# Altium PCB board.PcbDoc (part 2 of 2)
Units mm, origin at the board's own origin, x right, y up, seen from the top; angles counter-clockwise.
Board outline 123 x 60 mm, 4 copper layers (Top Layer, Mid Layer 1, Mid Layer 2, Bottom Layer), stack 1.17 mm thick; 104 components, 66 nets, 349 pads, 110 vias.
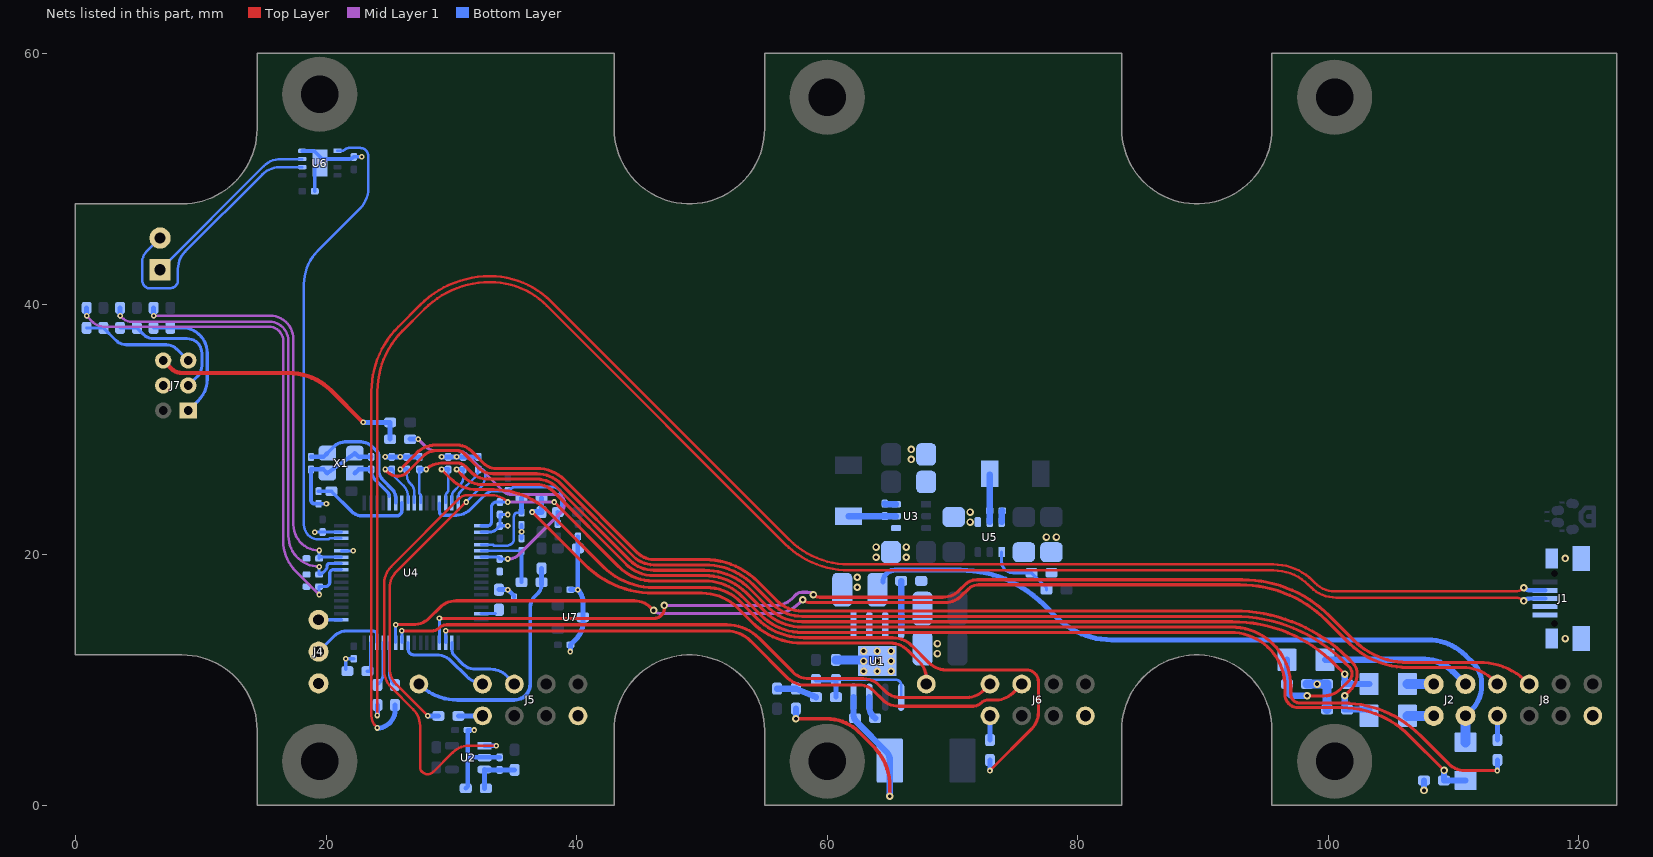
[diagram p4: the nets of this part, all layers, seen from the top]

## Via types
v1: diameter 0.45, hole 0.2, Top Layer to Bottom Layer, tented both sides, 59 vias
v2: diameter 0.6, hole 0.3, Top Layer to Bottom Layer, tented both sides, 51 vias

## Nets (pads, with @x,y where several pads share a name; then routed paths per layer and width w, separated by ;. In a path a pad name is that pad's centre, name@x,y a point inside that pad or via, vN(x,y) a via of type N, cw(c..) or ccw(c..) an arc to the next point about the centre after c; other vN are vias at no path point) (continued)
CAN_TX: U4.62 U6.1 | length 37.9
  Bottom Layer w0.2: U6.1@20.9,52.225 21.239,52.225 ccw(c21.239,52.624) 21.522,52.342 cw(c21.804,52.06) 21.804,52.459 22.725,52.459 cw(c22.725,51.818) 23.366,51.818 23.366,49.223 cw(c21.099,49.223) 22.702,47.62 19.342,44.26 ccw(c22.01,41.592) 18.237,41.592 18.237,22.381 ccw(c19.406,22.381) 19.406,21.213 20.13,21.213 ccw(c20.13,21.363) 20.236,21.257 cw(c20.342,21.15) 20.342,21.3 U4.62@21.225,21.3
DM: R3.1 U4.44 | length 3.4
  Bottom Layer w0.25: U4.44@25.05,12.975 25.05,10.555 ccw(c26.27,10.555) R3.1@25.407,9.693
DP: R5.1 U4.45 | length 3.4
  Bottom Layer w0.25: R5.1@24.193,9.693 ccw(c23.331,10.555) 24.55,10.555 U4.45@24.55,12.975
GND: C1.1 C5.1 C6.1 C7.1 C8.1 C10.2 C11.2 C12.2 C13.2 C14.1 C15.1 C16.1 C18.1 C19.1 C20.1 C21.2 C22.2 C23.2 C24.1 C25.1 C26.1 C27.1 C28.1 C29.1 C30.1 C31.1 C32.1 C33.1 C34.1 C35.2 C36.2 C37.2 C38.1 C39.1 C40.1 C41.1 C42.1 C45.1 J1.4 J1.5 J1.6 J1.7 J1.8 J1.9 J4.3 J5.7 J6.7 J7.4 J8.7 L5.1 R6.2 R7.2 R8.2 R15.2 R26.2 R33.2 R34.2 R35.2 U1.1 U1.9 U2.2 U3.4 U4.18 U4.60 U4.63 U5.4 U6.2 U6.8 U6.9 U7.3 X1.2 X1.4 | length 59.4
  Bottom Layer w0.25: v1(19.091,21.8) C24.1@19.726,21.8 U4.63@21.225,21.8 ; U4.60@21.225,20.3 v1(22.16,20.3) ; C42.1@21.575,10.825 v1(21.575,11.688) C27.1@22.21,11.688 ; U4.18@32.376,21.8 33.101,21.8 ccw(c33.101,22.463) 33.569,21.995 C25.1@33.875,22.3 ; v1(34.51,22.3) C25.1@33.875,22.3 ; v1(34.51,23.2) C10.2@33.875,23.2 C25.1@33.875,22.3
  Bottom Layer w0.3: U6.8@18.1,52.225 19.05,52.225 19.7,51.575 U6.2@20.9,51.575 21.798,51.575 ccw(c21.798,52.172) C31.1@22.221,51.75 v1(22.856,51.75) ; C34.1@18.8,26.8 18.8,24.361 ccw(c19.1,24.361) 19.1,24.061 v1(20.035,24.061) ; C32.1@19.1,49 19.1,50.85 U6.9@19.5,51.25
  Bottom Layer w0.35: C34.1@18.8,26.8 19.8,26.8 X1.4@20.1,26.5 X1.2@22.3,28.1 22.6,27.8 C33.1@23.6,27.8 ; R7.2@31.15,1.35 31.3,1.5 31.3,3.825 ; v1(31.835,6) C6.1@31.3,6 31.3,3.825 ; C5.1@33.85,3.825 31.3,3.825 ; v1(34.51,17.2) 34.922,16.788 cw(c34.734,16.6) C26.1@35,16.6 ; C29.1@35.6,21.3 v1(35.6,21.835) C30.1@35.6,22.36 ; v1(40.1,17.2) C45.1@40.1,20.5 L5.1@40.1,21.45
  Bottom Layer w0.4: v1(24.715,27.8) C35.2@25.25,27.8 v1(25.915,27.8) C36.2@26.45,27.8 C37.2@27.45,27.8 ; v1(29.216,27.8) C13.2@29.751,27.8 v1(30.416,27.8) C12.2@30.951,27.8 C11.2@32.151,27.8 ; C41.1@33.8,17.2 v1(34.51,17.2) ; v1(39.5,12.265) C39.1@39.5,12.8 39.957,13.257 ccw(c38.646,14.568) 40.5,14.568 U7.3@40.5,15 40.5,16.235 ccw(c39.135,16.235) v1(40.1,17.2) C40.1@39.5,17.2
  Bottom Layer w0.5: v2(107.634,1.176) R15.2@107.634,1.976
  Bottom Layer w0.7: R8.2@60.7,11.6 63.9,11.6 cw(c63.9,11.5) v2(64,11.5) ; R33.2@98.3,9.67 v2(99.1,9.67) R35.2@99.9,9.67 R34.2@99.9,7.63
  other v2: 62.9,10.7 64,10.7 65.1,10.7 62.9,11.5 65.1,11.5 68.8,12.1 62.9,12.3 64,12.3 65.1,12.3 68.8,12.9 118.9,13.3 62.4,17.4 62.4,18.2 118.9,19.7 63.9,19.8 66.3,19.8 63.9,20.6 66.3,20.6 77.5,21.4 78.3,21.4 71.4,22.6 71.4,23.4 66.7,27.6 66.7,28.4
HALL_1: J7.1 R9.1 R19.2 | length 10.6
  Bottom Layer w0.25: R19.2@6.233,38.1 R9.1@7.569,38.1 8.521,38.1 cw(c8.521,36.105) 10.516,36.105 10.516,33.981 cw(c8.185,33.981) 9.833,32.333 J7.1@9,31.5
HALL_2: J7.3 R10.1 R20.2 | length 10.5
  Bottom Layer w0.25: R20.2@3.561,38.1 R10.1@4.897,38.1 5.418,37.579 ccw(c6.245,38.405) 6.245,37.236 8.915,37.236 cw(c8.915,36.068) 10.084,36.068 10.084,35.068 cw(c8.915,35.068) 9.742,34.242 J7.3@9,33.5
HALL_3: J7.5 R11.1 R21.2 | length 9.1
  Bottom Layer w0.25: R21.2@0.889,38.1 R11.1@2.225,38.1 3.229,37.096 ccw(c4.055,37.922) 4.055,36.754 7.262,36.754 cw(c7.262,35.585) 8.088,36.412 J7.5@9,35.5
NetC2_1: C2.1 U1.7 | length 1.8
  Bottom Layer w0.5: U1.7@63.365,8.625 63.365,7.814 ccw(c64.356,7.814) 63.655,7.113 C2.1@63.825,6.944
NetC2_2: C2.2 L1.1 R1.1 U1.8 | length 21.1
  Top Layer w0.3: v2(57.5,6.9) 59.947,6.9 cw(c59.947,3.208) 62.558,5.818 63.672,4.705 cw(c60.465,1.498) 65,1.499 v2(65,0.724)
  Bottom Layer w0.5: v2(57.5,6.9) R1.1@57.5,7.7 ; U1.8@62.095,8.625 62.095,7.302 ccw(c63.086,7.302) 62.385,6.601 64.71,4.277 cw(c64.009,3.576) L1.1@65,3.576 ; v2(65,0.724) L1.1@65,3.56
NetC3_1: C3.1 C4.2 R1.2 | length 3.2
  Bottom Layer w0.5: C3.1@56,9.3 R1.2@57.5,9.3 C4.2@59.1,8.625
NetC4_1: C4.1 R2.2 R8.1 U1.5 | length 9.4
  Bottom Layer w0.2: R8.1@60.7,10 65.5,10 cw(c65.5,9.595) 65.905,9.595 U1.5@65.905,8.625
  Bottom Layer w0.4: R2.2@59.1,10 R8.1@60.7,10 C4.1@60.7,8.625
NetC5_2: C5.2 R4.2 R7.1 U2.3 | length 3.9
  Bottom Layer w0.4: R7.1@32.65,1.35 U2.3@32.65,2.825 ; U2.3@32.65,2.85 U2.3@32.65,2.825 ; R4.2@35.05,2.825 C5.2@33.85,2.825 U2.3@32.65,2.825
NetC9_1: C9.1 U3.6 | length 0.9
  Bottom Layer w0.5: C9.1@64.6,24.072 ccw(c64.65,24.072) 64.65,24.022 U3.6@65.5,24.022
NetC9_2: C9.2 L2.1 U3.5 | length 3.8
  Bottom Layer w0.5: L2.1@61.7,23.072 C9.2@64.6,23.072 U3.5@65.5,23.072
NetC11_1: C11.1 R18.2 U4.16 | length 28.4
  Top Layer w0.2: v1(28.125,7.13) 25.621,9.634 cw(c26.932,10.945) 25.078,10.945 25.078,17.331 cw(c26.932,17.331) 25.621,18.642 v1(31.179,24.2)
  Bottom Layer w0.2: U4.16@30.55,24.126 30.55,24.623 cw(c31.077,24.623) 30.705,24.996 31.882,26.174 ; v1(31.179,24.2) 32.343,25.364 ccw(c31.481,26.226) 32.7,26.226 32.7,26.5 ccw(c32.4,26.5) 32.4,26.8 C11.1@32.151,26.8 cw(c31.288,26.8) 31.898,26.189
  Bottom Layer w0.4: v1(28.125,7.13) R18.2@28.96,7.13
NetC12_1: C12.1 R17.2 U4.15 | length 97.5
  Top Layer w0.25: v1(30.416,26.8) 31.073,26.143 ccw(c32.384,27.454) 32.335,25.601 ccw(c32.384,27.454) 32.384,25.6 36.817,25.6 cw(c36.817,23.746) 38.128,25.057 43.939,19.247 ccw(c46.157,21.465) 46.157,18.328 50.216,18.328 cw(c50.216,13.641) 53.53,16.955 55.056,15.429 ccw(c57.976,18.35) 57.976,14.22 92.26,14.22 cw(c92.26,9.48) 97,9.48 97,8.881 ccw(c97.735,8.881) 97.735,8.146 101.181,8.146 cw(c101.181,-0.48) 107.28,5.62 109.6,3.3 ccw(c110.892,4.592) 110.892,2.765 v1(113.49,2.765)
  Bottom Layer w0.2: U4.15@30.05,24.126 30.05,24.687 cw(c30.604,24.687) 30.212,25.079 30.712,25.579 ccw(c30.137,26.154) 30.951,26.154 C12.1@30.951,26.8
  Bottom Layer w0.35: v1(30.416,26.8) C12.1@30.951,26.8
  Bottom Layer w0.4: v1(113.49,2.765) R17.2@113.49,3.6
NetC13_1: C13.1 R16.2 U4.14 | length 66.3
  Top Layer w0.25: v1(29.216,26.8) 29.974,26.042 ccw(c32.043,28.111) 32.043,25.185 33.416,25.185 cw(c33.416,18.986) 37.799,23.369 42.132,19.037 ccw(c46.147,23.052) 46.147,17.373 50.357,17.373 cw(c50.357,13.556) 53.056,16.255 54.416,14.895 ccw(c58.112,18.592) 58.113,13.364 65.258,13.364 cw(c65.258,11.245) 66.757,12.743 68.157,11.343 ccw(c69.468,12.654) 69.468,10.8 75.9,10.8 cw(c75.9,9.84) 76.86,9.84 76.86,7.403 cw(c75.006,7.403) 76.317,6.092 v1(72.99,2.765)
  Bottom Layer w0.2: U4.14@29.55,24.126 29.55,24.687 cw(c29.892,24.687) 29.65,24.929 ; 29.651,24.929 ccw(c29.409,25.171) 29.751,25.171 C13.1@29.751,26.8
  Bottom Layer w0.35: v1(29.216,26.8) C13.1@29.751,26.8
  Bottom Layer w0.4: v1(72.99,2.765) R16.2@72.99,3.6
NetC17_1: C17.1 U5.6 | length 0.9
  Bottom Layer w0.5: U5.6@73.922,22.6 73.922,23.45 cw(c73.972,23.45) C17.1@73.972,23.5
NetC17_2: C17.2 L3.1 U5.5 | length 3.8
  Bottom Layer w0.5: U5.5@72.972,22.6 C17.2@72.972,23.5 L3.1@72.972,26.4
NetC21_1: C21.1 R19.1 U4.59 | length 33.4
  Mid Layer 1 w0.2: v1(6.233,39.065) 15.515,39.065 cw(c15.515,37.181) 17.399,37.181 17.399,22.383 ccw(c19.448,22.383) v1(19.448,20.334)
  Bottom Layer w0.25: v1(19.448,20.334) C21.1@19.448,19.699 cw(c19.55,19.699) 19.55,19.8 U4.59@21.225,19.8
  Bottom Layer w0.4: v1(6.233,39.065) R19.1@6.233,39.7
NetC22_1: C22.1 R20.1 U4.58 | length 37.4
  Mid Layer 1 w0.2: v1(3.561,39.065) 3.694,38.932 ccw(c4.52,39.758) 4.52,38.59 15.472,38.59 cw(c15.472,37.07) 16.993,37.07 16.993,21.502 ccw(c19.448,21.502) v1(19.448,19.046)
  Bottom Layer w0.25: v1(19.448,19.046) C22.1@19.448,18.411 ccw(c19.448,18.79) 19.716,18.522 19.93,18.736 ccw(c19.54,19.126) 20.091,19.126 cw(c20.266,19.126) 20.266,19.3 U4.58@21.225,19.3
  Bottom Layer w0.4: v1(3.561,39.065) R20.1@3.561,39.7
NetC23_1: C23.1 R21.1 U4.57 | length 42.1
  Mid Layer 1 w0.2: v1(0.889,39.065) 1.41,38.544 ccw(c2.236,39.37) 2.236,38.202 15.418,38.202 cw(c15.418,37.033) 16.586,37.033 16.586,21.078 ccw(c19.969,21.078) 17.577,18.686 v1(19.448,16.815)
  Bottom Layer w0.25: v1(19.448,16.815) C23.1@19.448,17.45 19.947,17.45 ccw(c19.947,17.797) 20.295,17.797 20.295,18.517 cw(c20.578,18.517) 20.578,18.8 U4.57@21.225,18.8
  Bottom Layer w0.4: v1(0.889,39.065) R21.1@0.889,39.7
NetC28_2: C28.2 R25.1 U4.22 | length 23.2
  Mid Layer 1 w0.25: v1(27.35,29.21) 27.918,28.642 ccw(c28.744,29.468) 28.744,28.3 30.423,28.3 cw(c30.423,27.132) 31.25,27.958 34.126,25.082 ccw(c34.779,25.735) 34.779,24.811 38.334,24.811 cw(c38.334,24.109) 39.036,24.089 cw(c37.967,24.089) 38.723,23.333 35.384,19.994 cw(c34.557,20.82) 34.557,19.652 v1(34.501,19.652)
  Bottom Layer w0.25: U4.22@32.376,19.8 33.717,19.8 cw(c33.717,19.652) C28.2@33.866,19.652 v1(34.501,19.652)
  Bottom Layer w0.4: R25.1@26.715,29.21 v1(27.35,29.21)
NetC29_2: C29.2 R24.1 U4.21 | length 5.7
  Bottom Layer w0.2: U4.21@32.376,20.3 C29.2@35.6,20.3
  Bottom Layer w0.3: R24.1@35.6,17.8 C29.2@35.6,20.3
NetC30_2: C30.2 R23.1 U4.20 | length 6.7
  Bottom Layer w0.2: U4.20@32.376,20.8 33.258,20.8 cw(c33.258,20.65) 33.364,20.757 ccw(c33.47,20.863) 33.47,20.713 34.413,20.713 ccw(c34.413,21.3) 35.001,21.3 35.001,23.056 cw(c35.305,23.056) 35.305,23.36 C30.2@35.6,23.36
  Bottom Layer w0.4: C30.2@35.6,23.36 R23.1@35.6,24.5
NetC33_2: C33.2 U4.5 X1.1 | length 4.1
  Bottom Layer w0.28: C33.2@23.6,26.792 ccw(c24.819,26.792) 23.957,25.929 24.918,24.968 cw(c24.6,24.65) U4.5@25.05,24.65
  Bottom Layer w0.35: X1.1@22.3,26.5 22.6,26.8 C33.2@23.6,26.8
NetC34_2: C34.2 U4.6 X1.3 | length 10.6
  Bottom Layer w0.28: X1.3@20.1,28.1 20.643,28.643 cw(c21.505,27.781) 21.505,29 22.795,29 cw(c22.795,27.781) 23.657,28.643 24.059,28.241 ; 24.059,28.241 cw(c23.717,27.9) 24.2,27.9 24.2,26.798 ccw(c25.419,26.798) 24.557,25.936 25.296,25.196 cw(c24.6,24.55) 25.55,24.55 U4.6@25.55,24.126
  Bottom Layer w0.35: C34.2@18.8,27.8 19.8,27.8 X1.3@20.1,28.1
NetC35_1: C35.1 R29.1 R33.1 U4.8 | length 96.7
  Top Layer w0.25: v1(24.715,26.8) 24.935,26.58 ccw(c25.724,27.369) 25.724,26.253 ccw(c25.724,27.29) 26.456,26.556 27.775,27.875 cw(c28.801,26.849) 28.801,28.3 30.503,28.3 cw(c30.503,27.631) 30.976,28.104 32.13,26.95 ccw(c33.323,28.143) 33.323,26.456 36.817,26.456 cw(c36.817,23.746) 38.733,25.662 44.543,19.852 ccw(c46.157,21.465) 46.157,19.183 50.216,19.183 cw(c50.216,13.641) 54.135,17.56 55.661,16.034 ccw(c57.976,18.35) 57.976,15.075 92.452,15.075 cw(c92.452,2.588) 101.282,11.418 101.688,11.012 cw(c101.176,10.5) 101.9,10.5 cw(c101.176,10.5) 101.688,9.988 ; v2(98.3,8.73) 99.662,8.73 ccw(c99.662,10.584) 100.973,9.273 101.688,9.988
  Bottom Layer w0.2: C35.1@25.25,26.8 25.392,26.658 25.392,26.479 ccw(c25.824,26.479) 25.518,26.174 26.193,25.499 cw(c25.331,24.637) 26.55,24.637 U4.8@26.55,24.126
  Bottom Layer w0.35: v1(24.715,26.8) C35.1@25.25,26.8
  Bottom Layer w0.5: R29.1@96.7,11.6 R33.1@96.7,9.67 96.696,9.243 ccw(c97.209,9.243) 97.209,8.73 v2(98.3,8.73)
NetC36_1: C36.1 R30.1 R34.1 U4.9 | length 92.1
  Top Layer w0.25: v1(25.915,26.8) 27.229,28.114 cw(c28.742,26.601) 28.742,28.74 30.474,28.74 cw(c30.474,27.171) 31.584,28.281 32.566,27.298 ccw(c33.613,28.344) 33.613,26.865 ; 33.5,26.883 36.817,26.883 cw(c36.817,23.746) 39.036,25.964 44.846,20.154 ccw(c46.157,21.465) 46.157,19.611 50.216,19.611 cw(c50.216,13.641) 54.437,17.863 55.963,16.337 ccw(c57.976,18.35) 57.976,15.503 92.509,15.503 cw(c92.509,2.736) 101.536,11.764 101.946,11.354 cw(c101.093,10.5) 102.3,10.5 102.3,10.498 cw(c100.446,10.498) 101.757,9.187 v2(101.3,8.73)
  Bottom Layer w0.2: C36.1@26.45,26.8 26.45,26.327 ccw(c27.364,26.327) 26.718,25.68 26.811,25.588 cw(c26.232,25.009) 27.05,25.009 U4.9@27.05,24.126
  Bottom Layer w0.35: v1(25.915,26.8) C36.1@26.45,26.8
  Bottom Layer w0.5: R34.1@101.3,7.63 v2(101.3,8.73) ; R34.1@101.5,7.63 R30.1@103.256,7.63
NetC37_1: C37.1 R31.1 R35.1 U4.10 | length 85
  Top Layer w0.25: v1(27.985,26.8) cw(c29.192,25.593) 29.192,27.3 30.508,27.3 cw(c30.508,26.442) 31.115,27.049 31.593,26.571 ccw(c32.904,27.882) 32.904,26.028 36.817,26.028 cw(c36.817,23.746) 38.431,25.359 44.241,19.549 ccw(c46.157,21.465) 46.157,18.756 50.216,18.756 cw(c50.216,13.641) 53.833,17.258 55.358,15.732 ccw(c57.976,18.35) 57.976,14.647 92.331,14.647 cw(c92.331,3.078) 100.511,11.259 v2(101.3,10.47)
  Bottom Layer w0.2: C37.1@27.45,26.8 27.45,24.948 ccw(c27.643,24.948) 27.451,24.928 ccw(c27.643,24.948) 27.507,24.811 cw(c27.401,24.706) 27.546,24.741 cw(c27.401,24.706) U4.10@27.55,24.706 ; U4.10@27.55,24.126 U4.10@27.55,24.687
  Bottom Layer w0.35: C37.1@27.45,26.8 v1(27.985,26.8)
  Bottom Layer w0.5: R35.1@101.3,9.67 v2(101.3,10.47) ; R35.1@101.5,9.67 R31.1@103.256,9.67
NetC38_2: C38.2 R32.2 U4.7 | length 8.3
  Bottom Layer w0.28: R32.2@20.425,25.061 22.029,23.457 ccw(c22.891,24.319) 22.891,23.1 25.631,23.1 ccw(c25.631,23.519) 26.05,23.519 U4.7@26.05,24.126
  Bottom Layer w0.3: C38.2@19.4,25.061 R32.2@20.425,25.061
NetC41_2: C41.2 U4.31 | length 1.1
  Bottom Layer w0.25: U4.31@32.376,15.3 C41.2@33.501,15.3
NetC42_2: C42.2 U4.47 | length 2.5
  Bottom Layer w0.28: C42.2@23.3,10.7 23.55,10.7 U4.47@23.55,12.975
NetC43_2: C43.2 C44.2 L4.2 U4.13 | length 14
  Bottom Layer w0.25: U4.13@29.05,24.126 29.05,23.4 ccw(c29.306,23.4) 29.306,23.144 30.407,23.144 ccw(c30.407,24.682) 31.494,23.594 32.658,24.758 ; 32.658,24.758 cw(c33.484,23.932) 33.484,25.1 C43.2@34.51,25.1 cw(c35.234,24.376) 35.234,25.4 38.1,25.4 cw(c38.1,24.7) 38.8,24.7 C44.2@38.8,23.4
  Bottom Layer w0.35: L4.2@38.5,22.45 C44.2@38.5,23.4
NetJ1_2: J1.2 R3.2 | length 137.9
  Top Layer w0.2: v1(24.1,6.165) 23.968,6.297 cw(c24.791,7.121) 23.626,7.121 23.626,33.022 cw(c30.927,33.022) 25.765,38.185 27.503,39.923 cw(c33.057,34.369) 33.057,42.224 33.099,42.224 cw(c33.099,35.366) 37.948,40.215 56.966,21.197 ccw(c61.74,25.971) 61.74,19.22 95.615,19.22 cw(c95.615,14.791) 98.747,17.923 98.936,17.734 ccw(c100.533,19.33) 100.533,17.072 114.927,17.072 ccw(c114.927,18.021) v2(115.598,17.35)
  Bottom Layer w0.35: v2@115.598,17.35 ccw(c116.08,17.833) 116.08,17.15 J1.2@117.298,17.15
  Bottom Layer w0.4: v1(24.1,6.165) ccw(c24.1,7.565) 25.501,7.565 R3.2@25.501,8
NetJ1_3: J1.3 R5.2 | length 134.2
  Top Layer w0.2: v1(24.1,7.165) 24.1,33.022 cw(c30.927,33.022) 26.1,37.85 27.838,39.588 cw(c33.057,34.369) 33.057,41.75 33.099,41.75 cw(c33.099,35.366) 37.613,39.88 56.631,20.863 ccw(c61.74,25.971) 61.74,18.747 95.615,18.747 cw(c95.615,14.791) 98.412,17.588 98.601,17.399 ccw(c100.611,19.409) 100.611,16.566 114.955,16.566 cw(c114.955,15.658) v2(115.598,16.3)
  Bottom Layer w0.35: v2@115.598,16.3 cw(c116.08,15.817) 116.08,16.5 J1.3@117.298,16.5
  Bottom Layer w0.4: v1(24.1,7.165) R5.2@24.1,8
NetJ3_1: J3.1 U6.7 | length 14.9
  Bottom Layer w0.2: J3.1@6.75,42.73 15.022,51.002 cw(c16.405,49.619) 16.405,51.575 U6.7@18.1,51.575
NetJ3_2: J3.2 U6.6 | length 22
  Bottom Layer w0.2: J3.2@6.75,45.27 5.667,44.187 ccw(c6.471,43.383) 5.334,43.383 5.334,41.885 ccw(c5.969,41.885) 5.969,41.25 7.518,41.25 ccw(c7.518,41.91) 8.179,41.91 8.179,42.802 cw(c10.135,42.802) 8.752,44.185 14.919,50.352 cw(c16.302,48.969) 16.302,50.925 U6.6@18.1,50.925
NetR6_1: R6.1 U1.4 | length 3.5
  Bottom Layer w0.5: U1.4@65.905,14.375 R6.1@65.905,17.9
NetR13_1: R13.1 R24.2 TP2.1 | length 19.5
  Bottom Layer w0.3: TP2.1@27.41,9.67 ccw(c30.476,12.736) 30.476,8.4 35.03,8.4 ccw(c35.03,9.67) 36.3,9.67 36.3,15.795 cw(c37.519,15.795) 36.657,16.657 36.9,16.9 ccw(c36.175,17.625) R24.2@37.2,17.625
  Bottom Layer w0.4: R24.2@37.2,17.625 R24.2@37.2,17.8 R13.1@37.2,18.9
NetR14_1: R14.1 R23.2 TP1.1 | length 38.8
  Top Layer w0.25: v1(36.465,23.4) 40.671,19.195 ccw(c46.144,24.668) 46.144,16.927 50.01,16.927 cw(c50.01,12.924) 52.841,15.755 54.001,14.595 ccw(c58.006,18.6) 58.006,12.936 65.021,12.936 cw(c65.021,10.902) 66.459,12.341 67.367,11.433 cw(c66.056,10.122) 67.91,10.122 TP1.1@67.91,9.67
  Bottom Layer w0.4: R14.1@37.2,23.4 R23.2@37.2,24.5
  Bottom Layer w0.5: v1(36.465,23.4) R14.1@37.2,23.4
NetR26_1: R26.1 R27.2 U5.1 | length 5.5
  Bottom Layer w0.25: U5.1@73.922,20.2 73.922,19.446 ccw(c74.818,19.446) 74.818,18.55 R26.1@76.3,18.55 77.5,17.35 R27.2@77.5,17.2
SWCLK: J4.1 U4.49 | length 1.8
  Bottom Layer w0.25: J4.1@19.4,14.8 U4.49@21.225,14.8
SWDIO: J4.2 U4.46 | length 6.1
  Bottom Layer w0.25: J4.2@19.4,12.26 20.642,13.502 cw(c21.602,12.542) 21.602,13.9 23.746,13.9 cw(c23.746,13.595) 24.05,13.595 U4.46@24.05,12.975
TEMP_MTR: J7.6 R12.1 R25.2 | length 21.3
  Top Layer w0.35: J7.6@7,35.5 7.665,34.835 ccw(c8.491,35.662) 8.491,34.493 17.018,34.493 cw(c17.018,29.662) 20.434,33.078 v1(22.956,30.556)
  Bottom Layer w0.4: v1(22.956,30.556) R12.1@25.115,30.556 R25.2@25.115,29.21
U: J2.2 R29.2 | length 11.9
  Bottom Layer w0.5: R29.2@99.748,11.6 107.722,11.6 cw(c107.722,8.465) 109.938,10.682 J2.2@110.95,9.67
U_H: J5.2 U4.41 | length 7.6
  Bottom Layer w0.25: U4.41@26.55,12.975 26.55,12.45 ccw(c27,12.45) 27,12 28.793,12 cw(c28.793,10.293) 30,11.5 31.22,10.28 ccw(c32.5,11.561) 32.408,9.752 ccw(c32.5,11.561) J5.2@32.5,9.75 ; J5.2@32.455,9.705 J5.2@32.49,9.67
U_Iout: J5.1 R18.1 | length 1.9
  Bottom Layer w0.4: R18.1@30.56,7.13 J5.1@32.49,7.13
U_L: J5.4 U4.34 | length 6.7
  Bottom Layer w0.25: U4.34@30.05,12.975 30.05,12.363 ccw(c30.61,12.363) 30.214,11.967 30.917,11.265 ccw(c31.902,12.25) 31.902,10.857 33.125,10.857 cw(c33.125,9.003) 34.436,10.314 J5.4@35,9.75 ; J5.4@34.975,9.725 J5.4@35.03,9.67
V: J2.3 R30.2 | length 2.1
  Bottom Layer w0.8: R30.2@106.304,7.13 J2.3@108.41,7.13
V_H: J6.2 U4.42 | length 50.4
  Top Layer w0.25: v1(26.05,13.91) 28.43,13.91 ccw(c28.43,14.787) 29.05,14.167 cw(c29.613,13.605) 29.613,14.4 52.006,14.4 cw(c52.006,10.841) 54.522,13.358 57.236,10.643 ccw(c58.548,11.954) 58.548,10.1 62.9,10.1 cw(c62.9,8.349) 64.138,9.587 64.625,9.1 ccw(c65.832,10.307) 65.832,8.6 71.152,8.6 ccw(c71.152,10.454) 72.463,9.143 J6.2@72.99,9.67
  Bottom Layer w0.25: U4.42@26.05,12.975 v1(26.05,13.91)
V_Iout: J6.1 R16.1 | length 1.9
  Bottom Layer w0.4: R16.1@72.99,5.2 J6.1@72.99,7.13
V_L: J6.4 U4.35 | length 49.6
  Top Layer w0.25: v1(29.55,13.91) 51.948,13.91 cw(c51.948,11.154) 53.897,13.103 56.86,10.14 ccw(c58.172,11.451) 58.172,9.597 62.533,9.597 cw(c62.533,7.901) 63.731,9.101 64.388,8.443 ccw(c65.699,9.754) 65.699,7.9 71.66,7.9 ccw(c71.66,8.754) 72.263,8.149 ; 72.263,8.15 cw(c72.867,7.546) 72.867,8.4 73.492,8.4 ccw(c73.492,10.254) 74.803,8.943 J6.4@75.53,9.67
  Bottom Layer w0.25: U4.35@29.55,12.975 v1(29.55,13.91)
Vb: C1.2 J2.4 R22.1 U1.2 U1.3 | length 56.8
  Bottom Layer w0.4: C1.2@64.457,17.823 cw(c65.394,17.823) 65.394,18.759 70.646,18.759 cw(c70.646,9.39) 77.272,16.015 78.247,15.04 ccw(c82.689,19.482) 82.689,13.2 107.959,13.2 cw(c107.959,8.997) 110.931,11.969 111.584,11.316 cw(c110.05,9.781) 112.22,9.781 112.22,9.506 cw(c109.55,9.506) 111.438,7.618 J2.4@110.95,7.13
  Bottom Layer w0.8: R22.1@110.95,5.024 J2.4@110.95,7.13
VB_SNS: C10.1 R15.1 R22.2 U2.1 U4.17 | length 127.3
  Top Layer w0.2: v1(33.585,4.75) 31.418,4.75 ccw(c31.418,2.896) 30.107,4.207 28.573,2.673 cw(c28.103,3.144) 28.103,2.479 cw(c28.103,3.082) 27.5,3.082 27.5,6.341 ccw(c25.646,6.341) 26.957,7.652 25.189,9.42 cw(c26.5,10.731) 24.646,10.731 24.646,17.719 cw(c26.5,17.719) 25.189,19.03 30.665,24.506 cw(c31.229,23.941) 31.229,24.739 33.208,24.739 cw(c33.208,22.898) v1(34.51,24.2)
  Top Layer w0.25: v1(38.2,24.2) 43.373,19.027 ccw(c46.094,21.748) 46.094,17.9 50.216,17.9 cw(c50.216,13.641) 53.228,16.653 54.753,15.127 ccw(c57.976,18.35) 57.976,13.792 92.187,13.792 cw(c92.187,9.438) 96.541,9.438 96.541,8.84 ccw(c97.596,8.84) 97.596,7.784 101.124,7.784 cw(c101.124,0.295) 106.419,5.591 v2(109.234,2.776)
  Mid Layer 1 w0.25: v1(34.51,24.2) v1(38.2,24.2)
  Bottom Layer w0.25: U4.17@32.376,22.3 32.895,22.3 ccw(c32.895,22.605) 33.2,22.605 33.2,23.784 cw(c33.616,23.784) 33.616,24.2 C10.1@33.875,24.2 v1(34.51,24.2)
  Bottom Layer w0.35: U2.1@32.65,4.75 v1(33.585,4.75)
  Bottom Layer w0.5: v2(109.234,2.776) R15.1@109.234,1.976 R22.2@110.95,1.976
W: J2.1 R31.2 | length 2.1
  Bottom Layer w0.8: R31.2@106.304,9.67 J2.1@108.41,9.67
W_H: J8.2 U4.43 | length 93.6
  Top Layer w0.25: v1(25.55,14.41) 26.942,14.41 ccw(c26.942,16.264) 28.253,14.953 29.071,15.771 cw(c30.382,14.46) 30.382,16.314 44.603,16.314 cw(c44.603,14.46) 45.914,15.771 v2(46.141,15.544) ; v2(58.041,16.4) ccw(c58.582,16.941) 58.582,16.176 69.416,16.176 ccw(c69.416,18.01) 70.713,16.713 71.25,17.25 ; 71.251,17.251 cw(c72.095,16.405) 72.095,17.6 92.945,17.6 cw(c92.945,7.81) 99.867,14.733 101.678,12.922 ccw(c106.318,17.562) 106.318,11 110.698,11 cw(c110.698,7.471) 113.194,9.966 J8.2@113.49,9.67
  Mid Layer 1 w0.25: v2(46.141,15.544) ccw(c46.73,16.134) 46.73,15.3 55.767,15.3 ccw(c55.767,18.135) 57.771,16.13 v2(58.041,16.4)
  Bottom Layer w0.25: U4.43@25.55,12.975 v1(25.55,14.41)
W_Iout: J8.1 R17.1 | length 1.9
  Bottom Layer w0.4: R17.1@113.49,5.2 J8.1@113.49,7.13
W_L: J8.4 U4.36 | length 93
  Top Layer w0.25: v1(29.05,14.91) 46.19,14.91 ccw(c46.19,15.72) 47,15.72 v2(47,15.944) ; v2(58.9,16.8) ccw(c59.383,17.283) 59.383,16.6 69.232,16.6 ccw(c69.232,18.454) 70.543,17.143 71,17.6 cw(c71.966,16.634) 71.966,18 93.145,18 cw(c93.145,8.21) 100.067,15.133 102.022,13.178 ccw(c106.314,17.469) 106.314,11.4 112.014,11.4 cw(c112.014,5.88) 115.917,9.783 J8.4@116.03,9.67
  Mid Layer 1 w0.25: v2(47,15.944) 55.876,15.944 ccw(c55.876,17.798) 57.187,16.487 57.488,16.788 cw(c58,16.276) 58,17 58.417,17 cw(c58.417,16.317) v2(58.9,16.8)
  Bottom Layer w0.25: U4.36@29.05,12.975 v1(29.05,14.91)
pads on no net: J1. LOGO1. U4.2 U4.3 U4.4 U4.11 U4.23 U4.24 U4.25 U4.26 U4.27 U4.28 U4.29 U4.30 U4.37 U4.38 U4.39 U4.40 U4.50 U4.51 U4.52 U4.53 U4.54 U4.55 U4.56

## Polygon pours and split planes (outlines as drawn)
GND on Bottom Layer "NONET_L02_P-001" (solid, remove dead copper, pour order 3): 42.75,28.396 ccw(c40.896,28.396) 40.896,30.25 35.25,30.25 ccw(c35.232,28.453) 35.232,30.25 19.354,30.25 ccw(c19.354,28.396) 17.5,28.396 17.5,-1.25 42.75,-1.25
GND on Bottom Layer "NONET_L02_P-001" (solid, remove dead copper, pour order 4): -0.75,40.25 4.5,40.25 cw(c4.5,39.75) 5,39.75 5,34.426 cw(c4.564,34.426) 4.564,33.99 -0.75,33.99
GND on Bottom Layer "NONET_L02_P-001" (solid, remove dead copper, pour order 2): 114.04,14.2 114.04,20.481 cw(c115.259,20.481) 115.259,21.7 124.2,21.7 124.2,5.6 121.019,5.6 cw(c121.019,6.819) 119.8,6.819 119.8,7.935 ccw(c118.581,7.935) 119.443,8.797 114.04,14.2
GND on Bottom Layer "NONET_L02_P-001" (solid, remove dead copper, pour order 0): 60.7,10.3 cw(c60.7,11.1) 59.9,11.1 59.9,20.06 cw(c62.44,20.06) 62.44,22.6 65.8,22.6 ccw(c65.8,22.9) 66.1,22.9 66.1,27.9 cw(c67.3,27.9) 67.3,29.1 70.2,29.1 cw(c70.2,27.5) 71.8,27.5 71.8,25.583 ccw(c72.483,25.583) 72,25.1 72.359,24.741 cw(c72.017,24.4) 72.5,24.4 72.5,22.3 ccw(c72.8,22.3) 72.8,22 77.9,22 cw(c77.9,20.9) 79,20.9 79,18.1 cw(c78.5,18.1) 78.5,17.6 70.2,17.6 ccw(c70.2,16.7) 69.3,16.7 69.3,11.4 cw(c68.2,11.4) 68.2,10.3
GND on Mid Layer 1 "NONET_L02_P-001" (solid, remove dead copper, pour order 5): -6.75,60.75 -6.75,-4.75 131.5,-4.75 131.5,60.75
3V3 on Mid Layer 1 "NONET_L02_P-001" (solid, remove dead copper, pour order 1): 31.75,-3.4 31.75,5.732 cw(c33.604,5.732) 32.293,7.043 46.457,21.207 cw(c47.768,19.896) 47.768,21.75 59.982,21.75 ccw(c59.982,23.604) 61.293,22.293 64.207,25.207 ccw(c62.896,26.518) 64.75,26.518 64.75,29.896 ccw(c62.896,29.896) 62.896,31.75 13.268,31.75 cw(c13.268,33.604) 11.957,32.293 3.893,40.357 ccw(c2.582,39.046) 2.582,40.9 -2,40.9 -2,-3.4
GND on Mid Layer 2 (split plane): 483 vertices, not listed, extent 0.51,0.51 122.49,59.49

## Keep-outs
Keep-Out Layer:
  circle w0: c114,35 r6
  circle w0: c73.5,35 r6
  circle w0: c33,35 r6
  lines w0: 0,12 8.5,12 cw(c8.5,6) 14.5,6 14.5,0 43,0 43,6 cw(c49,6) 55,6 55,0 83.5,0 83.5,6 cw(c89.5,6) 95.5,6 95.5,0 123,0 123,60 95.5,60 95.5,54 cw(c89.5,54) 83.5,54 83.5,60 55,60 55,54 cw(c49,54) 43,54 43,60 14.5,60 14.5,54 cw(c8.5,54) 8.5,48 0,48 0,12

## Other copper
Top Layer:
  rectangle net 15V: 80.579,8.934 82.238,10.402
Mid Layer 1:
  region net 15V: 68.4,20.083 ccw(c69.807,20.083) 68.812,19.088 70.846,17.054 cw(c69.993,16.2) 71.2,16.2 ccw(c71.9,16.2) 71.9,15.5 72.9,15.5 ccw(c72.9,16.2) 73.6,16.2 73.6,17 ccw(c72.9,17) 72.9,17.7 72.852,17.7 cw(c72.852,20.24) 71.056,18.444 69.787,19.713 cw(c70.479,20.405) 69.5,20.405 69.5,20.8 ccw(c69.1,20.8) 69.1,21.2 68.8,21.2 ccw(c68.8,20.8) 68.4,20.8
Bottom Layer:
  region net 3V3: 65.4,27.3 63.9,27.3 cw(c63.9,27.6) 63.6,27.6 63.6,28.4 cw(c63.9,28.4) 63.9,28.7 65.4,28.7
  region net Vb: 63.2,13.5 ccw(c63.4,13.5) 63.4,13.3 64.619,13.3 ccw(c64.619,13.481) 64.8,13.481 64.8,17.8 63.2,17.8
  region net 15V: 67.599,23.3 ccw(c67.599,22.801) 67.1,22.801 67.1,19.6 ccw(c67.4,19.6) 67.4,19.3 72.7,19.3 ccw(c72.7,19.9) 73.3,19.9 73.3,20.524 ccw(c72.724,20.524) 72.724,21.1 69.2,21.1 cw(c69.2,21.6) 68.7,21.6 68.7,22.8 ccw(c68.2,22.8) 68.2,23.3
  region net 15V: 69.6,17.3 cw(c70.6,17.3) 70.6,18.3 cw(c70.601,9.61) 76.746,15.754 80.503,11.997 cw(c78.581,10.074) 81.3,10.073 81.3,9.6 cw(c80.6,9.6) 80.6,8.9 cw(c80.6,9.624) 80.088,9.112 78.7,10.5 ccw(c77.976,9.776) 77.976,10.8 73.2,10.8 cw(c73.2,12.2) 71.8,12.2 71.8,16.86 ccw(c71.56,16.86) 71.56,17.1 71.436,17.1 ccw(c71.436,16.864) 71.2,16.864 71.2,15.6 69.6,15.6
Multi-Layer:
  pour cut-out: 22.8,60.25 22.8,56.75 cw(c19.5,56.75) 19.5,53.45 19.5,60.25
  pour cut-out: 16.2,60.25 16.2,56.75 ccw(c19.5,56.75) 19.5,53.45 19.5,60.25
  pour cut-out: 56.7,60 56.7,56.5 ccw(c60,56.5) 60,53.2 60,60
  pour cut-out: 63.3,60 63.3,56.5 cw(c60,56.5) 60,53.2 60,60
  pour cut-out: 103.8,60 103.8,56.5 cw(c100.5,56.5) 100.5,53.2 100.5,60
  pour cut-out: 97.2,60 97.2,56.5 ccw(c100.5,56.5) 100.5,53.2 100.5,60
  pour cut-out: 97.2,0 97.2,3.5 cw(c100.5,3.5) 100.5,6.8 100.5,0
  pour cut-out: 103.8,0 103.8,3.5 ccw(c100.5,3.5) 100.5,6.8 100.5,0
  pour cut-out: 56.7,0 56.7,3.5 cw(c60,3.5) 60,6.8 60,0
  pour cut-out: 63.3,0 63.3,3.5 ccw(c60,3.5) 60,6.8 60,0
  pour cut-out: 22.8,0 22.8,3.5 ccw(c19.5,3.5) 19.5,6.8 19.5,0
  pour cut-out: 16.2,0 16.2,3.5 cw(c19.5,3.5) 19.5,6.8 19.5,0

## Silkscreen, mask and mechanical layers (free items; w line width, h text height)
Bottom Overlay:
  text "EBC CTRL 2k23 v1.1.0" at 122.644,24.587 h0.8